# EAGLE board TESTED_Midi2PO (EAGLE 9.6.2)
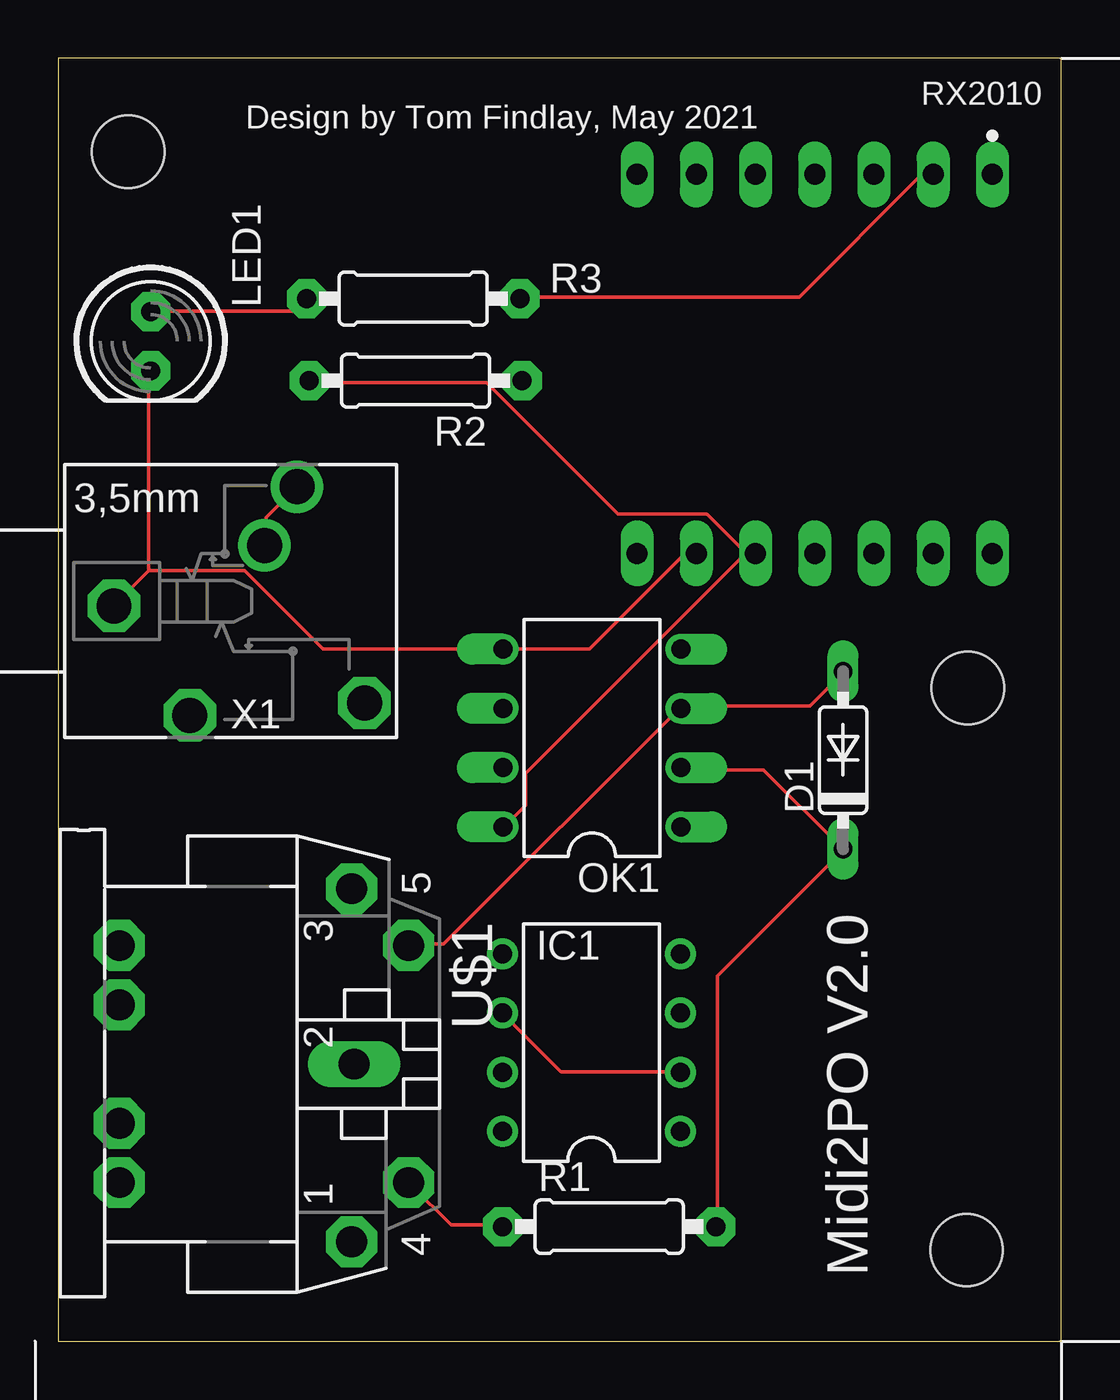
[diagram p0: board, top side]
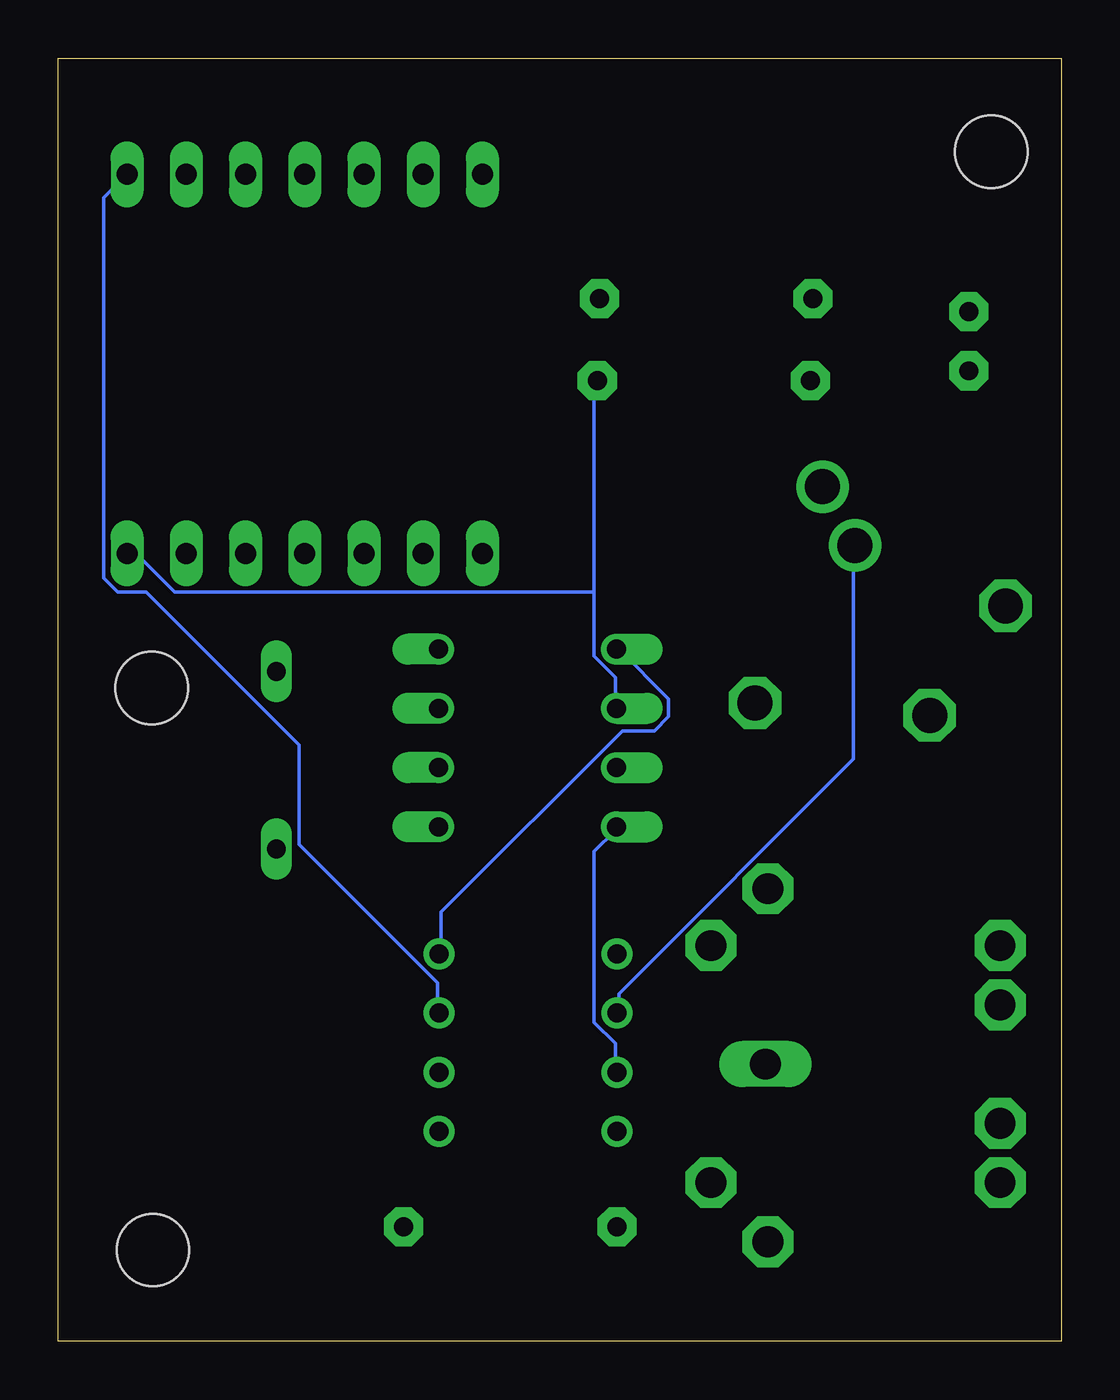
[diagram p1: board, bottom side, seen from below]

Size 43 x 55 mm. Coordinates in mm from the lower left corner, seen from the top.
Outline: 0,0 43,0 43,55 0,55 0,0
Copper layers (1*16): Top 0.035mm / dielectric 1.5mm / Bottom 0.035mm
Design rules "default": minimum track width 6mil, minimum drill 0.35mm, track to track 6mil, track to pad 6mil, pad to pad 6mil, via to via 6mil, smd to smd 6mil, copper to edge 40mil, drill to drill 6mil, minimum pad ring 10mil, minimum via ring 8mil, stop-mask expansion 4mil, vias tented up to drill 0mil, thermal gap 10mil
Holes 3.11 mm at 38.94,3.91 3,51 39,28

## Footprints (pad centres in the part's own frame; a part is rotated, then mirrored left to right if it is on the bottom)
DO35-7 = drill 0.813 long: A 3.81,0; C -3.81,0
DIL08 = drill 0.813 pad 1.27: 1 -3.81,-3.81; 2 -1.27,-3.81; 3 1.27,-3.81; 4 3.81,-3.81; 5 3.81,3.81; 6 1.27,3.81; 7 -1.27,3.81; 8 -3.81,3.81
LED5MM = drill 0.813 pad 1.676 octagon: A -1.27,0; K 1.27,0
DIL08' = drill 0.813 offset: 1 -3.81,-3.81; 2 -1.27,-3.81; 3 1.27,-3.81; 4 3.81,-3.81; 5 3.81,3.81; 6 1.27,3.81; 7 -1.27,3.81; 8 -3.81,3.81
0207/9 = drill 0.813 pad 1.676 octagon: 1 -4.572,0; 2 4.572,0
MOUDLE14P-2.54-21X17.8MM = drill 0.9 long: PAD0 0.762,18.161; PAD1 0.762,15.621; PAD2 0.762,13.081; PAD3 0.762,10.541; PAD4 0.762,8.001; PAD5 0.762,5.461; PAD6 0.762,2.921; PAD14 17.018,18.161; PAD15 17.018,15.621; PAD16 17.018,13.081; PAD17 17.018,10.541; PAD18 17.018,8.001; PAD19 17.018,5.461; PAD20 17.018,2.921
CP-2350 = drill 1.321 pad 2.184 octagon: 1 7.62,12.58; 3 -7.52,12.58; 4 5.08,15.02; 5 -5.08,15.02; PE -2.54,2.62; PE1 -5.08,2.62; PE2 5.08,2.62; PE@ 2.54,2.62 | drill 1.321 long: 2 0,12.68
PG203J = drill 1.499 octagon: 1 -5.004,-0.203; 4 5.74,-4.369; 5 -1.753,-4.902 | drill 1.499: 2 2.845,4.902; 3 1.448,2.388

## Placement (x,y rotation side)
D1  1N4148DO35-7  [DO35-7]  33.65,24.91 90 top
IC1  TL071P  [DIL08]  22.86,12.8 90 top
LED1  [LED5MM]  3.96,42.87 270 top
OK1  6N138  [DIL08']  22.88,25.86 90 top
R1  410  [0207/9]  23.62,4.91 0 top
R2  410  [0207/9]  15.32,41.18 180 top
R3  410  [0207/9]  15.22,44.7 0 top
U1  [MOUDLE14P-2.54-21X17.8MM]  21.89,50.79 270 top
U$1  MIDIJACK  [CP-2350]  0,11.88 270 top
X1  1503_09  [PG203J]  7.39,31.73 0 top

## Library data of the parts
D1 = diode
IC1 = linear
LED1 R1-R3 U$1 = adafruit
OK1 = optocoupler; MF: VISHAY/TELEFUNKEN; MPN: 6N138; OC_FARNELL: 9860150; OC_NEWARK: 35K5294
U1 = Seeeduino XIAO_holes
X1 = con-hirschmann; OC_FARNELL: 1243244; OC_NEWARK: unknown

## Nets
N$1: D1.C OK1.2 R1.2
N$2: R1.1 U$1.4
N$3: D1.A OK1.3 U$1.5
N$4: IC1.4 LED1.K OK1.5 U1.PAD19 X1.1
N$5: OK1.6 R2.1 U1.PAD14
N$6: IC1.7 OK1.8 R2.2 U1.PAD18
N$7: IC1.3 U1.PAD0
N$8: LED1.A R3.1
N$9: R3.2 U1.PAD1
N$11: IC1.2 IC1.6 X1.2 X1.3

## Tracks (layer width: path | path; a pad name or v marks a point on that pad's centre or on a via)
N$1
  Top 0.152: OK1.2 26.74,24.49 30.24,24.49 33.59,21.14 D1.C 33.59,20.99 28.26,15.66 28.26,4.99 R1.2
N$2
  Top 0.152: R1.1 18.96,4.99 16.83,4.99 15.15,6.66 U$1.4
N$3
  Top 0.152: D1.A 33.59,28.61 32.22,27.24 26.74,27.24 OK1.3 26.58,27.08 16.53,17.03 15.15,17.03 U$1.5
N$4
  Top 0.152: 3.88,33.03 3.88,41.56 LED1.K | 3.88,33.03 2.5,31.66 X1.1 | U1.PAD19 27.35,33.64 26.74,33.64 22.77,29.68 19.12,29.68 OK1.5 18.96,29.68 11.34,29.68 7.99,33.03 3.88,33.03
  Bottom 0.152: IC1.4 26.58,16.72 26.58,18.4 18.81,26.17 17.44,26.17 16.83,26.78 16.83,27.54 18.96,29.68 OK1.5
N$5
  Bottom 0.152: 20.03,32.11 20.03,41.11 R2.1 | 20.03,32.11 20.03,29.37 19.12,28.46 19.12,27.24 OK1.6 | 20.03,32.11 38.01,32.11 39.54,33.64 40,33.64 U1.PAD14
N$6
  Top 0.152: 29.63,33.64 29.33,33.64 20.03,24.34 20.03,22.97 19.12,22.06 OK1.8 | 29.63,33.64 29.79,33.64 U1.PAD18 29.63,33.64 | 29.63,33.64 27.8,35.47 23.99,35.47 18.36,41.11 10.89,41.11 R2.2
  Bottom 0.152: IC1.7 19.12,11.54 19.12,12.76 20.03,13.67 20.03,20.99 19.12,21.9 OK1.8
N$7
  Bottom 0.152: IC1.3 26.74,14.13 26.74,15.35 32.68,21.29 32.68,25.56 39.23,32.11 40.45,32.11 41.06,32.72 41.06,49.03 40.15,49.94 U1.PAD0
N$8
  Top 0.152: LED1.A 4.03,44.15 10.12,44.15 10.58,44.61 R3.1
N$9
  Top 0.152: U1.PAD1 37.41,49.94 36.95,49.94 31.77,44.76 19.88,44.76 R3.2
N$11
  Top 0.152: X1.3 8.91,34.25 8.91,35.31 10.12,36.53 X1.2 | IC1.2 26.58,11.54 21.55,11.54 19.12,13.98 IC1.6
  Bottom 0.152: X1.3 8.91,34.1 8.91,24.95 18.96,14.89 18.96,14.13 IC1.6

## Text on the board
tNames: Design by Tom Findlay, May 2021 | RX2010 | Midi2PO V2.0